# EAGLE board dcy.vca.v1.0.1.pnl (EAGLE 7.7.0)
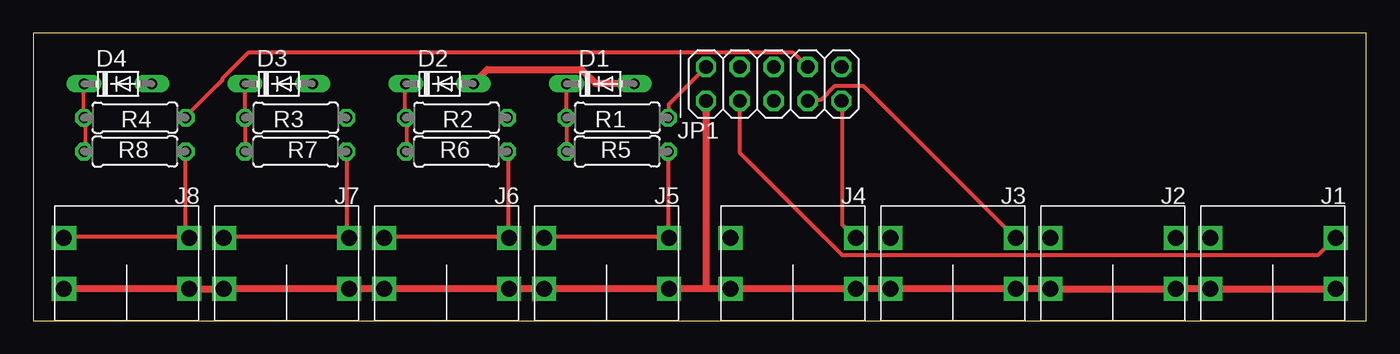
[diagram p0: board, top side]
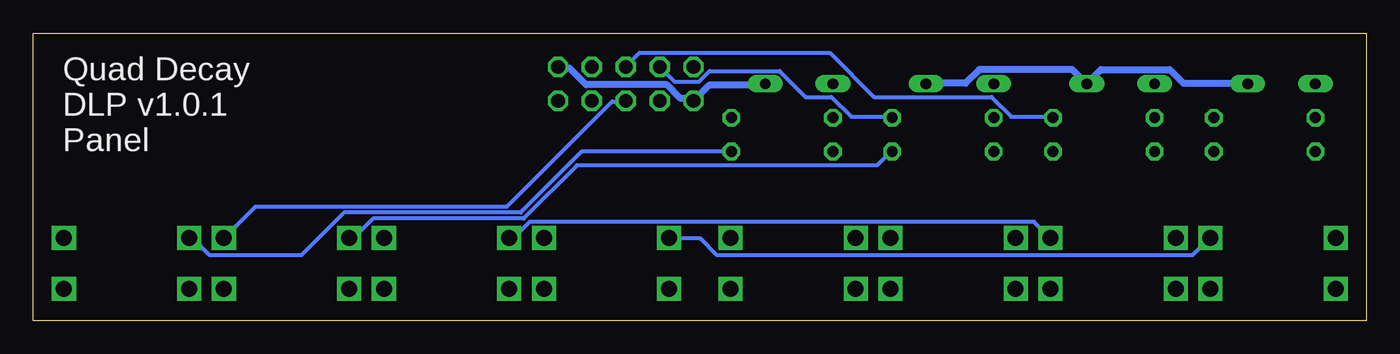
[diagram p1: board, bottom side, seen from below]

Size 100 x 21.58 mm. Coordinates in mm from the lower left corner, seen from the top.
Outline: 0,0 100,0 100,21.58 0,21.58 0,0
Copper layers (1*16): Top 0.035mm / dielectric 1.5mm / Bottom 0.035mm
Design rules "SeeedStudio_2layer_DRU_no_angle_20140221 *": minimum track width 12mil, minimum drill 12mil, track to track 6mil, track to pad 6mil, pad to pad 6mil, via to via 6mil, smd to smd 0mil, copper to edge 10mil, drill to drill 10mil, minimum pad ring 10mil, minimum via ring 6mil, stop-mask expansion 2mil, vias tented up to drill 100mil, thermal gap 10mil
Net classes: 1 pwr: width 0.508 mm

## Footprints (pad centres in the part's own frame; a part is rotated, then mirrored left to right if it is on the bottom)
DO34-5 = drill 0.813 long: A 2.54,0; C -2.54,0
CL1384 = drill 1.2 square: P$1 0,0; P$2 9.4,0; P$3 0,-3.8; P$4 9.4,-3.8
2X05 = drill 1.016 octagon: 1 -5.08,-1.27; 2 -5.08,1.27; 3 -2.54,-1.27; 4 -2.54,1.27; 5 0,-1.27; 6 0,1.27; 7 2.54,-1.27; 8 2.54,1.27; 9 5.08,-1.27; 10 5.08,1.27
0207/7 = drill 0.813 octagon: 1 -3.81,0; 2 3.81,0

## Placement (x,y rotation side)
D1  1N5232B  [DO34-5]  42.55,17.78 0 top
D2  1N5232B  [DO34-5]  30.48,17.78 0 top
D3  1N5232B  [DO34-5]  18.41,17.78 0 top
D4  1N5232B  [DO34-5]  6.35,17.78 0 top
J1  TRG1  [CL1384]  97.7,2.4 180 top
J2  TRG2  [CL1384]  85.7,2.4 180 top
J3  TRG3  [CL1384]  73.7,2.4 180 top
J4  TRG4  [CL1384]  61.7,2.4 180 top
J5  EOC1  [CL1384]  47.7,2.4 180 top
J6  EOC2  [CL1384]  35.7,2.4 180 top
J7  EOC3  [CL1384]  23.7,2.4 180 top
J8  EOC4  [CL1384]  11.7,2.4 180 top
JP1  PNL  [2X05]  55.55,17.78 0 top
R1  2.2K  [0207/7]  43.81,15.24 180 top
R2  2.2K  [0207/7]  31.75,15.24 180 top
R3  2.2K  [0207/7]  19.68,15.24 180 top
R4  2.2K  [0207/7]  7.62,15.24 180 top
R5  1K  [0207/7]  43.81,12.7 0 top
R6  1K  [0207/7]  31.75,12.7 0 top
R7  1K  [0207/7]  19.68,12.7 0 top
R8  1K  [0207/7]  7.62,12.7 0 top

## Library data of the parts
D1-D4 R1-R8 = _common
J1-J8 = jacks
JP1 = pinhead

## Nets
0V [pwr]: D1.A D2.A D3.A D4.A J1.P$1 J1.P$2 J2.P$1 J2.P$2 J3.P$1 J3.P$2 J4.P$1 J4.P$2 J5.P$1 J5.P$2 J6.P$1 J6.P$2 J7.P$1 J7.P$2 J8.P$1 J8.P$2 JP1.1 JP1.10
N$1: D1.C R1.2 R5.1
N$2: J1.P$4 J5.P$3 J5.P$4 R5.2
N$3: D2.C R2.2 R6.1
N$4: D3.C R3.2 R7.1
N$5: D4.C R4.2 R8.1
N$6: J2.P$4 J6.P$3 J6.P$4 R6.2
N$7: J3.P$4 J7.P$3 J7.P$4 R7.2
N$8: J4.P$4 J8.P$3 J8.P$4 R8.2
N$EOC1: JP1.2 R1.1
N$EOC2: JP1.4 R2.1
N$EOC3: JP1.6 R3.1
N$EOC4: JP1.8 R4.1
N$TRG1: J1.P$3 JP1.3
N$TRG2: J2.P$3 JP1.5
N$TRG3: J3.P$3 JP1.7
N$TRG4: J4.P$3 JP1.9

## Tracks (layer width: path | path; a pad name or v marks a point on that pad's centre or on a via)
0V
  Top 0.508: D1.A 45.03,17.83 42.18,17.83 41.15,18.86 34.06,18.86 33.03,17.83 D2.A | J8.P$2 2.4,2.4 11.66,2.4 J8.P$1 11.89,2.4 14.29,2.4 J7.P$2 14.52,2.4 23.55,2.4 J7.P$1 23.77,2.4 J6.P$2 26.52,2.4 35.55,2.4 J6.P$1 35.78,2.4 J5.P$2 38.52,2.4 47.55,2.4 J5.P$1 47.78,2.4 50.52,2.4 | J1.P$1 97.61,2.4 88.47,2.4 J1.P$2 88.24,2.4 85.72,2.4 J2.P$1 85.5,2.4 76.47,2.4 J2.P$2 76.24,2.4 73.72,2.4 J3.P$1 73.5,2.4 64.47,2.4 J3.P$2 64.24,2.4 61.72,2.4 J4.P$1 61.49,2.4 52.46,2.4 J4.P$2 52.23,2.4 50.52,2.4 | 50.52,2.4 50.52,16.46 JP1.1
  Bottom 0.508: D1.A 45.15,17.72 49.26,17.72 50.41,16.57 JP1.1 50.63,16.69 51.44,16.69 52.46,17.72 58.52,17.72 59.78,18.97 60.58,18.97 JP1.10 | D4.A 8.91,17.83 13.72,17.83 14.74,18.86 19.89,18.86 20.92,17.83 D3.A 21.14,17.95 22.06,18.86 29.03,18.86 30.06,17.83 32.92,17.83 D2.A
N$1
  Top 0.305: R5.1 R1.2 D1.C
N$2
  Top 0.305: R5.2 47.66,12.69 47.66,6.29 J5.P$3 47.55,6.29 38.41,6.29 J5.P$4
  Bottom 0.305: J1.P$4 88.24,6.17 88.01,6.17 86.75,4.92 79.9,4.92 76.69,8.12 63.44,8.12 58.86,12.69 47.66,12.69 R5.2
N$3
  Top 0.305: R6.1 28,12.8 28,15.2 R2.2 27.89,15.32 27.89,17.72 D2.C
N$4
  Top 0.305: R7.1 15.89,12.8 15.89,15.2 R3.2 15.89,15.32 15.89,17.72 D3.C
N$5
  Top 0.305: R8.1 3.89,12.8 3.89,15.2 R4.2 3.77,15.32 3.77,17.72 D4.C
N$6
  Top 0.305: R6.2 35.66,12.69 35.66,6.29 J6.P$3 35.55,6.29 26.4,6.29 J6.P$4
  Bottom 0.305: J2.P$4 76.24,6.29 75.89,6.29 74.52,7.66 63.21,7.66 59.21,11.66 36.69,11.66 35.66,12.69 R6.2
N$7
  Top 0.305: R7.2 23.55,12.69 23.55,6.4 23.66,6.29 J7.P$3 23.55,6.29 14.4,6.29 J7.P$4
  Bottom 0.305: J3.P$4 64.24,6.29 63.89,6.29 62.75,7.43 24.92,7.43 23.77,6.29 J7.P$3
N$8
  Top 0.305: R8.2 11.43,6.51 11.66,6.29 J8.P$3 11.32,6.51 11.09,6.29 2.4,6.29 J8.P$4
  Bottom 0.305: J4.P$4 52.23,6.17 49.95,6.17 48.69,4.92 13.03,4.92 11.77,6.17 J8.P$3
N$EOC1
  Top 0.305: R1.1 47.66,15.32 47.66,16.23 50.41,18.97 JP1.2
N$EOC2
  Bottom 0.305: R2.1 35.66,15.32 38.63,15.32 40.12,16.8 42.06,16.8 44.01,18.75 49.26,18.75 50.06,17.95 51.89,17.95 52.92,18.97 JP1.4
N$EOC3
  Bottom 0.305: R3.1 23.55,15.32 26.63,15.32 28.12,16.8 36.92,16.8 40.23,20.12 54.52,20.12 55.55,19.09 JP1.6
N$EOC4
  Top 0.305: R4.1 11.43,15.32 14.17,18.06 14.17,18.17 16.12,20.12 57.04,20.12 58.06,19.09 JP1.8
N$TRG1
  Top 0.305: JP1.3 53.03,16.46 53.03,12.57 60.69,4.92 96.36,4.92 97.61,6.17 J1.P$3
N$TRG2
  Bottom 0.305: JP1.5 55.66,16.46 56.58,16.46 64.47,8.57 83.33,8.57 85.61,6.29 J2.P$3
N$TRG3
  Top 0.305: JP1.7 58.18,16.57 59.09,16.57 60.12,17.6 62.29,17.6 73.61,6.29 J3.P$3
N$TRG4
  Top 0.305: JP1.9 60.69,16.46 60.69,7.2 61.61,6.29 J4.P$3

## Text on the board
bNames: Quad Decay / DLP v1.0.1 / Panel